# Altium PCB HMC460_2_a.PcbDoc
Units mil, origin at the board's own origin, x right, y up, seen from the top; angles counter-clockwise.
Board outline 5412 x 4271 mil, 3 copper layers (Top Layer, InternalPlane1, Bottom Layer); 47 components, 29 nets, 201 pads, 167 vias.
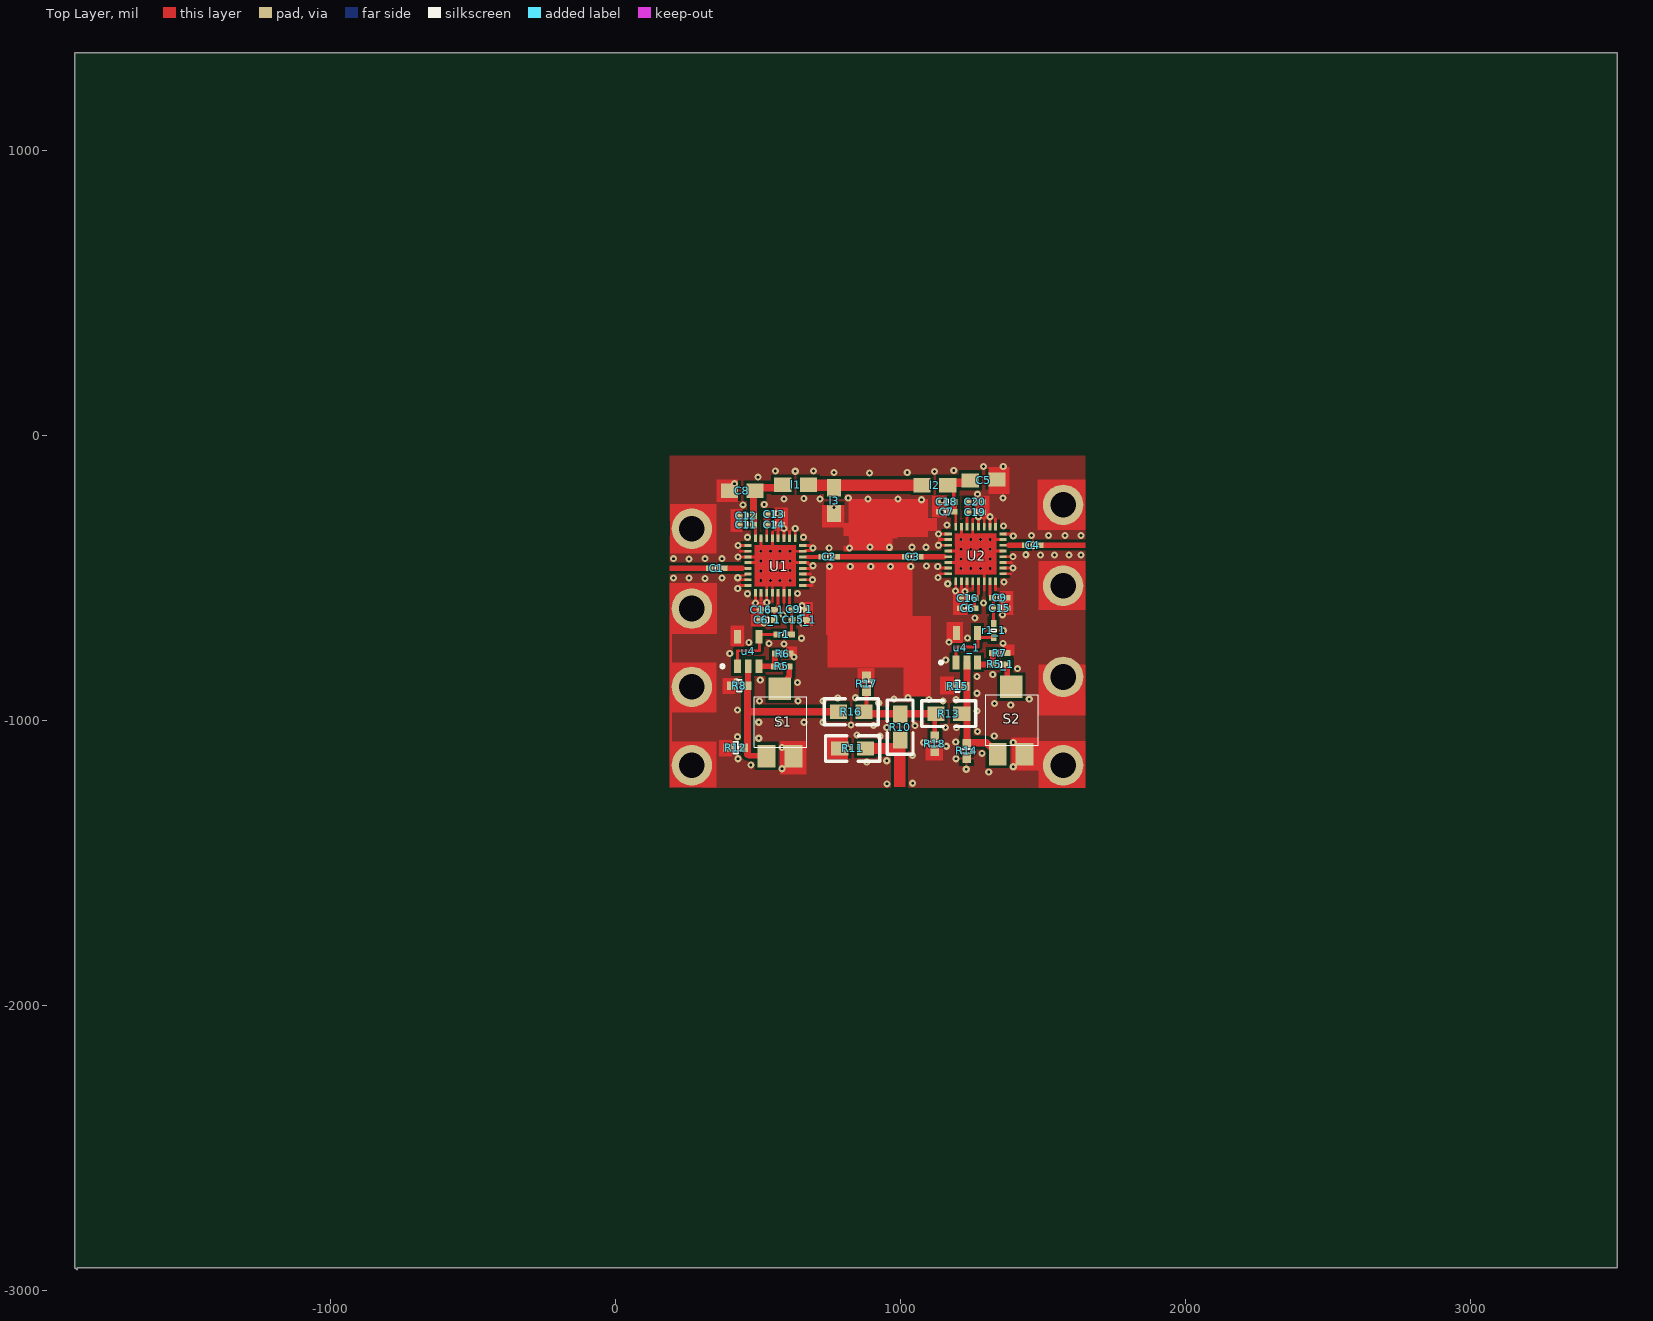
[diagram p0: Top Layer view]
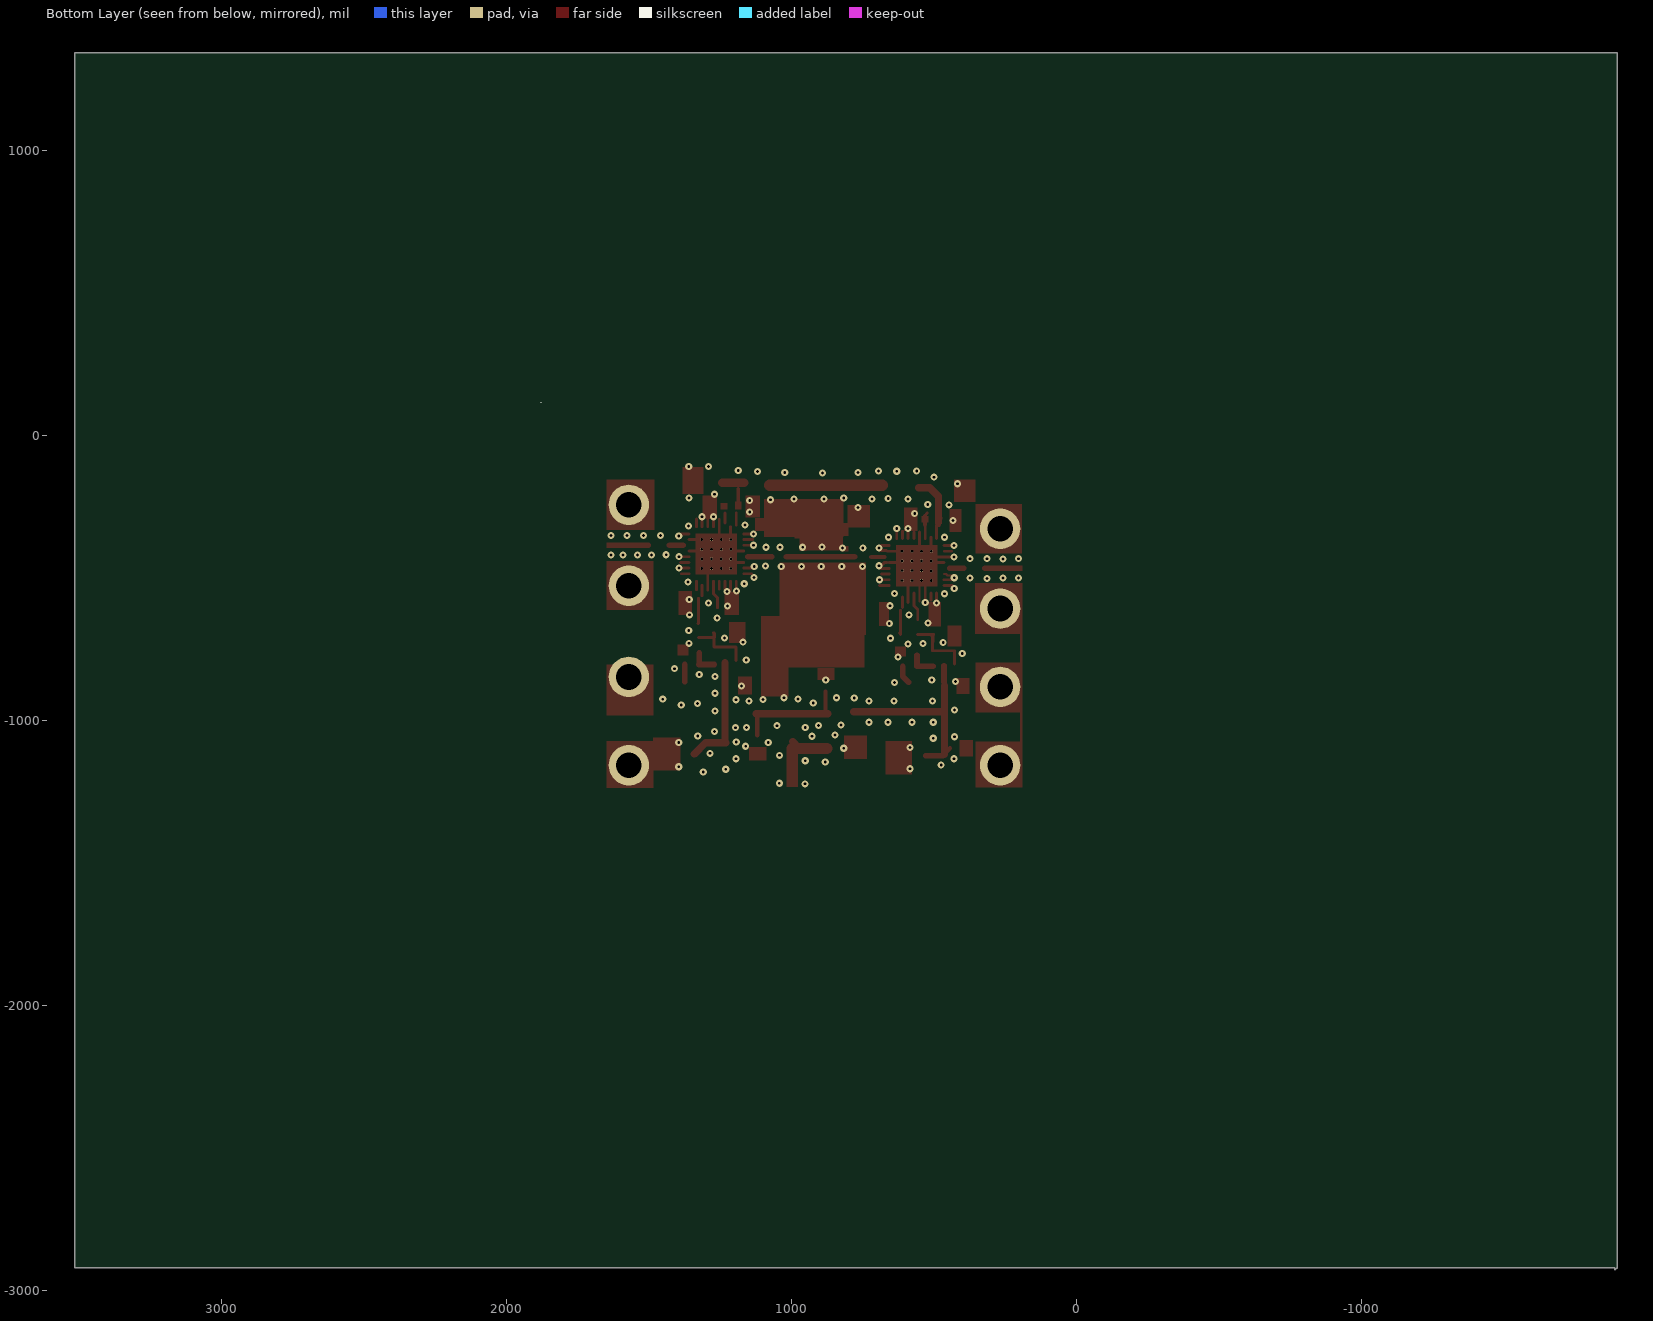
[diagram p1: Bottom Layer view, seen from below]
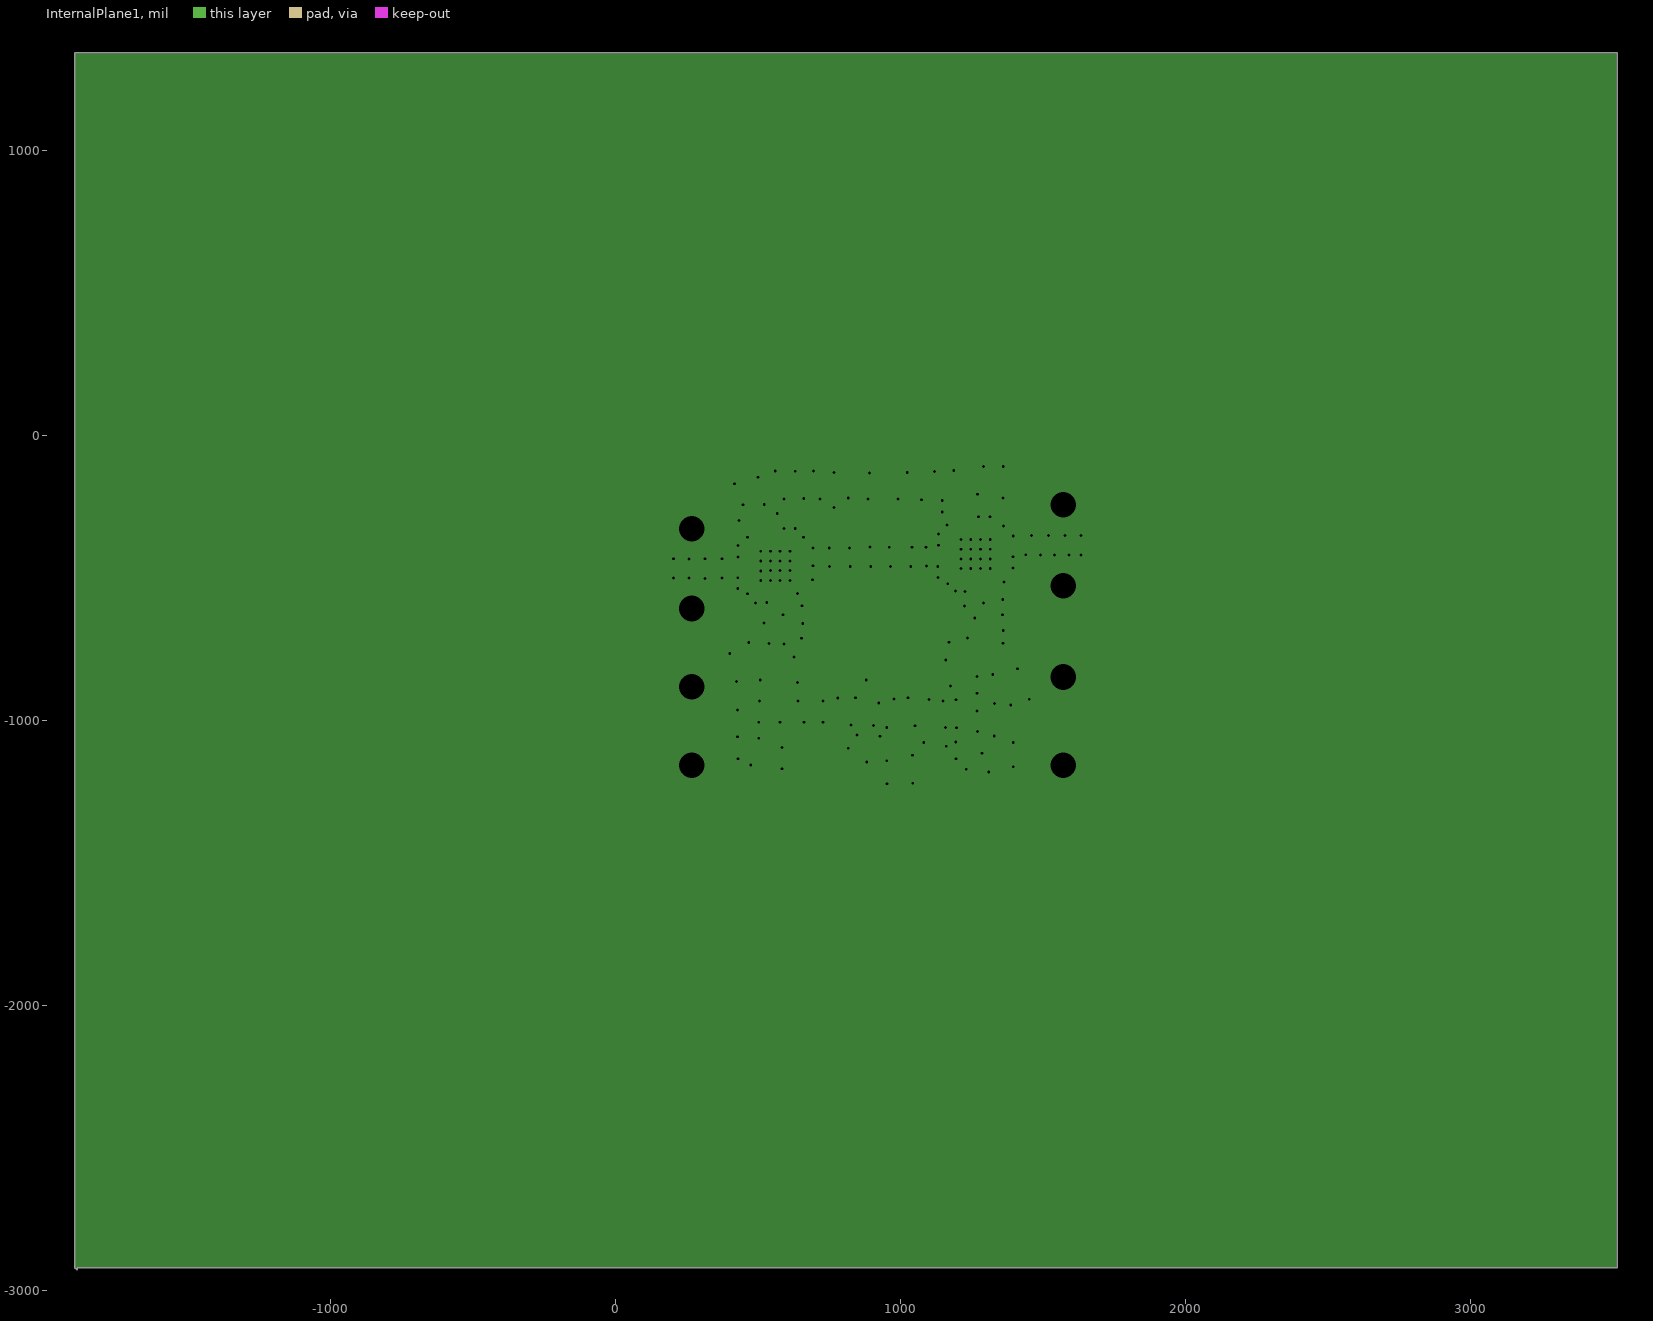
[diagram p2: InternalPlane1, clearances drawn from the general rule]

## Layer stack, top to bottom
Top Layer: signal copper 1.4
Dielectric: core 12.6, FR-4, Dk 4.8
InternalPlane1: plane copper 1.4, net GND
Dielectric: prepreg 12.6, FR-4, Dk 4.8
Bottom Layer: signal copper 1.4

## Board outline
-1898,-2921 -1898,1342 -1440,1342 3514,1342 3514,852 3514,-2921 3320,-2921 -1890,-2921 -1890,-2929

## Design rules (kind name [scope] priority, off if disabled: settings)
Clearance [OnLayer('Top Layer')] p1: gap=5
ComponentClearance [All] p1: gap=10 collisioncheckmode=3 verticalgap=15
PlaneClearance [All] p1: clearance=20
PlaneConnect [All] p1: planeconnectstyle=Relief reliefexpansion=20 reliefentries=4 reliefconductorwidth=10 reliefairgap=10
PolygonConnect [All] p1: connectstyle=Relief reliefconductorwidth=10 reliefentries=4 polygonreliefangle="90 Angle"
RoutingVias [All] p1: holewidth=10 width=20 viastyle="Through Hole" minholewidth=10 minwidth=20 maxholewidth=28 maxwidth=50
SolderMaskExpansion [All] p1: expansion=4
TestPointUsage [All] p1: valid=0 allowmultiple=FALSE
Testpoint [All] p1: side=15 testpointundercomponent=TRUE minsize=40 maxsize=100 preferedsize=60 minholesize=0 maxholesize=40 preferedholesize=32 testpointgrid=1 style=1023 order=0123456789
Width [All] p1: maxlimit=300 minlimit=5 preferedwidth=10 minimp=50.000000 maximp=50.000000 favimp=50.000000
16 further rules are at their usual default settings.

## Components (designator, comment, footprint, x,y, rotation, side; value= is the part's Value field where it differs from the comment)
C1 "" 0402 330,-467 r0 top
C2 "" 0402 774,-426 r180 top
C3 "" 0402 1017,-426 r0 top
C4 "" 0402 1438,-386 r0 top
C5 "" 0805#1 1248,-155 r0 top
C6 "" 0402 1260,-607 r180 top
C6_1 "" 0402 557,-648 r180 top
C7 "" 0402 1186,-268 r180 top
C8 "" 0805#2 489,-195 r180 top
C9 "" 0402 1322,-570 r0 top
C9_1 "" 0402 619,-611 r0 top
C11 "" 0402 483,-314 r180 top
C12 "" 0402 483,-283 r180 top
C13 "" 0402 531,-277 r0 top
C14 "" 0402 531,-314 r0 top
C15 "" 0402 1322,-607 r0 top
C15_1 "" 0402 619,-648 r0 top
C16 "" 0402 1260,-571 r180 top
C16_1 "" 0402 557,-612 r180 top
C18 "" 0402 1186,-234 r180 top
C19 "" 0402 1236,-270 r0 top
C20 "" 0402 1236,-233 r0 top
l1 "" 0805#2 676,-174 r180 top
l2 "" 0805#2 1075,-175 r0 top
l3 "" 0805#2 766,-184 r270 top
r1 "" 0402 616,-699 r180 top
r1_1 "" 0402 1326,-660 r270 top
R5 "" 0402 558,-811 r0 top
R5_1 "" 0402 1374,-804 r180 top
R6 "" 0402 561,-766 r0 top
R7 "" 0402 1323,-764 r0 top
R8 "" 0603 461,-879 r180 top
R10 "" 0805#2 998,-1069 r90 top
R11 "" 0805#2 876,-1099 r180 top
R12 "" 0603 449,-1097 r180 top
R13 "" 0805#2 1124,-977 r0 top
R14 "" 0603 1231,-1080 r270 top
R15 "" 0603 1227,-880 r180 top
R16 "" 0805#2 871,-970 r180 top
R17 "" 0603 880,-899 r90 top
R18 "" 0603 1120,-1055 r270 top
S1 "" ST4B_trim 623,-1126 r0 top
S2 "" ST4B_trim 1435,-1119 r0 top
U1 "" HMC460LC5#1 464,-387 r0 top
U2 "" HMC460LC5#2 1167,-346 r0 top
u4 "" SO-G5/P.95 465,-768 r0 top
u4_1 "" SO-G5/P.95 1232,-755 r0 top

## Footprints (in the part's own frame and the unit in brackets; to place one, negate y for a bottom-side part, rotate by r counter-clockwise, add the part's x,y. Pads: shape width x height; smd on the part's side, far side on the other; paste and mask are expansions set on the pad)
0402 [mil]
  rect 25x20 smd: 1(0,0) 2(50,0)
  silkscreen extent 20,-10 30,10
0603 [mil]
  rect 30x30 smd: 1(0,0) 2(55,0)
  silkscreen extent 20,-20 35,20
0805#1 [mil]
  rect 60x50 smd: 1(-4,-4) 2(90,0)
0805#2 [mil]
  rect 60x50 smd: 1(0,0) 2(90,0)
HMC460LC5#1 [mil]
  round 10 hole 10 mask+0: 0(45,-122) 0(45,-89) 0(45,-54) 0(45,-20) 0(79,-122) 0(79,-88) 0(79,-54) 0(79,-20) 0(113,-122) 0(113,-88) 0(113,-54) 0(113,-20) 0(147,-122) 0(147,-88) 0(147,-54) 0(147,-20)
  rect 26x10 smd: 1(0,0) 2(0,-20) 3(0,-40) 4(0,-60) 5(0,-80) 6(0,-100) 7(0,-120) 8(0,-140) 17(192,-140) 18(192,-120) 19(192,-100) 20(192,-80) 21(192,-60) 22(192,-40) 23(192,-20) 24(192,0)
  rect 10x26 smd: 9(26,-166) 10(46,-166) 11(66,-166) 12(86,-166) 13(106,-166) 14(126,-166) 15(146,-166) 25(166,25) 26(146,25) 27(126,25) 28(106,25) 29(86,25) 30(66,25) 31(46,25) 32(26,25)
  Top Layer region: 169,2 23,2 23,-143 169,-143
HMC460LC5#2 [mil]
  round 10 hole 10 mask+0: 0(45,-122) 0(45,-88) 0(45,-54) 0(45,-20) 0(79,-122) 0(79,-88) 0(79,-54) 0(79,-20) 0(113,-122) 0(113,-88) 0(113,-54) 0(113,-20) 0(147,-122) 0(147,-88) 0(147,-54) 0(147,-20)
  rect 26x10 smd: 1(0,0) 2(0,-20) 3(0,-40) 4(0,-60) 5(0,-80) 6(0,-100) 7(0,-120) 8(0,-140) 17(192,-140) 18(192,-120) 19(192,-100) 20(192,-80) 21(192,-60) 22(192,-40) 23(192,-20) 24(192,0)
  rect 10x26 smd: 9(26,-166) 10(46,-166) 11(66,-166) 12(86,-166) 13(106,-166) 14(126,-166) 15(146,-166) 16(166,-166) 25(166,25) 26(146,25) 27(126,25) 28(106,25) 29(86,25) 30(66,25) 31(46,25) 32(26,25)
  Top Layer region: 169,2 23,2 23,-143 169,-143
SO-G5/P.95 [mm] "5LEAD SOT23"
  rect 0.62x1.22 smd: 1(-0.95,-1.075) 2(0,-1.075) 3(0.95,-1.075) 4(0.965,1.549) 5(-0.94,1.549)
  silkscreen extent -2.45,-1.22 -2.15,-0.93
ST4B_trim [mm]
  rect 1.6x2 smd mask+0: 1(0,0) 3(-2.4,0)
  rect 2x2 smd mask+0: 2(-1.2,6)
  silkscreen extent -3.5,0.8 1.2,5.3

## Free pads (board coordinates)
  round 142 hole 90: 1(267,-328) 1(1570,-244) 5(267,-608) 6(1570,-848) 6(1570,-528)
  round 142 hole 90 unplated mask+0: 3(1570,-1158) 4(267,-1158) 5(267,-883)

## Via types
v1: diameter 25, hole 10, Top Layer to Bottom Layer, 167 vias

## Nets (pads, with @x,y where several pads share a name; then routed paths per layer and width w, separated by ;. In a path a pad name is that pad's centre, name@x,y a point inside that pad or via, vN(x,y) a via of type N, cw(c..) or ccw(c..) an arc to the next point about the centre after c; other vN are vias at no path point)
GND: C5.2 C6.2 C6_1.2 C7.2 C8.2 C9.2 C9_1.2 C11.2 C12.2 C13.2 C14.2 C15.2 C15_1.2 C16.2 C16_1.2 C18.2 C19.2 C20.2 l3.2 pad.1 pad.3 pad.4 pad.5 pad.6 R6.2 R7.2 R8.2 R11.2 R12.2 R14.2 R15.2 R17.2 R18.2 S1.1 S2.1 U1.0 U1.1 U1.2 U1.3 U1.4 U1.6 U1.7 U1.8 U1.9 U1.10 U1.11 U1.12 U1.14 U1.17 U1.18 U1.19 U1.20 U1.21 U1.23 U1.24 U1.25 U1.26 U1.27 U1.28 U1.29 U1.31 U2.0 U2.1 U2.2 U2.3 U2.4 U2.7 U2.8 U2.9 U2.10 U2.11 U2.12 U2.14 U2.16 U2.17 U2.18 U2.19 U2.20 U2.21 U2.23 U2.24 U2.25 U2.26 U2.27 U2.28 U2.31 u4.5 u4_1.5 | length 2315.3
  Top Layer w8: v1@426,-492 452.27,-492 457.27,-487 U1.6 ; U1.11 530,-524 ; 550,-583 550,-526.66 ; U2.14 1293,-482
  Top Layer w10: 193,-1230 193,-694 194,-694 ; 434,-527 U1.8 ; v1@434,-387 U1.1 ; v1@436,-507 U1.7 ; v1@436,-427 U1.3 491,-427 ; 437,-407 U1.2@463,-407 ; U1.4 492,-447 ; v1@490,-580 U1.9 ; 510,-579 U1.10 ; 510,-401 U1.31 ; v1@530,-582 U1.11@530,-554 ; 550,-395 550,-339 ; U1.28 570,-339 ; 590,-587 590,-521 ; U1.27 v1@590,-339 ; U1.26 610,-337 ; 619,-407 662.69,-407 665.69,-404 v1@689,-404 ; 620,-447 U1.21 ; U1.25 v1@630,-337 ; U1.17 690,-527 ; U1.18 v1@688,-507 ; U1.19 684,-487 ; U1.20 v1@687,-467 ; U1.24 v1@685,-387 ; U1.21@664,-447 674,-447 v1@687,-460 ; 789,-454 805,-454 ; v1@970.6,-453.8 v1@971,-455 ; v1(1132,-346) U2.1 ; v1@1135,-466 U2.7 ; 1135,-366 U2.2 ; v1@1137,-386 U2.3 ; 1140,-486 U2.8 ; 1167,-446 1199,-446 ; U2.4 1195,-406 ; v1@1193,-540 U2.9 ; 1213,-543 U2.10 ; 1213,-360 U2.31 ; v1@1233,-541 U2.11 ; 1253,-540 U2.12 ; 1253,-321 1253,-296 ; U2.28 v1@1273,-295 ; 1293,-543 U2.14 ; U2.27 1293,-296 ; U2.26 v1@1313,-295 ; 1322,-366 U2.23 ; 1323,-406 U2.21 ; 1333,-542 U2.16 ; U2.25 1333,-294 ; U2.17 1386,-486 ; U2.18 v1@1391,-466 ; U2.19 1389,-446 ; U2.20 v1@1388,-426 ; U2.24 v1@1388,-346
  other v1: 952,-1223 1042,-1221 1309,-1182 1230,-1172 583,-1170 1395,-1163 474,-1157 881,-1147 951,-1142 429,-1135 1194,-1135 1041,-1123 1285,-1116 816,-1098 583,-1095 1160,-1091 1081,-1078 1395,-1078 1193,-1076 502,-1063 427,-1058 927,-1056 1328,-1055 846,-1052 1270,-1040 1196,-1026 951,-1025 1157,-1025 1050,-1019 904,-1018 826,-1017 502,-1007 577,-1007 661,-1007 727,-1007 1268,-968 427,-964 1386,-946 1329,-941 923,-940 639,-933 727,-933 505,-932 1148,-932 1194,-928 1099,-927 1451,-926 976,-925 779,-922 841,-921 1026,-921 1268,-905 1175,-880 638,-867 424,-864 507,-859 879,-859 1268,-847 1323,-839 1410,-819 1158,-788 625,-778 400,-766 591,-732 538,-731 1359,-730 467,-727 1170,-726 652,-712 1234,-711 1360,-685 656,-661 520,-659 1260,-641 587,-630 1357,-630 1224,-599 654,-598 490,-588 1291,-588 530,-587 1358,-576 462,-556 638,-555 1225,-548 1192,-547 428,-538 1165,-521 1362,-515 691,-507 313,-502 203,-501 257,-501 373,-501 428,-500 1131,-499 1394,-466 823,-461 750,-460 895,-460 964,-460 1035,-460 1130,-460 1090,-459 692,-458 257,-434 203,-433 313,-433 373,-433 429,-427 1394,-426 1491,-420 1540,-420 1590,-420 1633,-420 1439,-419 692,-396 749,-395 820,-395 960,-393 1040,-393 1089,-393 892,-392 429,-387 1132,-386 462,-358 659,-358 1395,-353 1459,-352 1519,-352 1577,-352 1633,-352 590,-327 630,-327 1361,-318 1162,-315 432,-299 1273,-286 1313,-286 567,-275 1146,-269 766,-253 447,-244 521,-243 1146,-229 1073,-226 591,-223 717,-223 885,-223 990,-223 660,-222 816,-220 1359,-220 1270,-207 417,-170 499,-147 890,-132 766,-130 1023,-130 1119,-127 630,-126 560,-125 694,-125 1186,-124 1290,-110 1360,-110
NetAR1_1: 
NetAR1_3: 
NetC5_1: 
NetC6_1: 
NetC7_1: 
NetC7_2: 
NetC8_1: 
NetC8_2: 
NetC9_2: 
NetC10_1: 
NetC10_2: 
NetC11_1: 
NetC12_1: 
NetC13_1: 
NetC14_1: 
NetC15_1: 
NetC16_1: 
NetF1_2: 
NetR4_1: 
NetU1_2: 
NetU1_3: 
NetU1_4: 
NetU4_3: 
NetU4_4: 
VCC: 
VDD: 
VDD-A: 
VIN: 
pads on no net: C1.1 C1.2 C2.1 C2.2 C3.1 C3.2 C4.1 C4.2 C5.1 C6.1 C6_1.1 C7.1 C8.1 C9.1 C9_1.1 C11.1 C12.1 C13.1 C14.1 C15.1 C15_1.1 C16.1 C16_1.1 C18.1 C19.1 C20.1 l1.1 l1.2 l2.1 l2.2 l3.1 r1.1 r1.2 r1_1.1 r1_1.2 R5.1 R5.2 R5_1.1 R5_1.2 R6.1 R7.1 R8.1 R10.1 R10.2 R11.1 R12.1 R13.1 R13.2 R14.1 R15.1 R16.1 R16.2 R17.1 R18.1 S1.2 S1.3 S2.2 S2.3 U1.5 U1.13 U1.15 U1.22 U1.30 U1.32 U2.5 U2.6 U2.13 U2.15 U2.22 U2.29 U2.30 U2.32 u4.1 u4.2 u4.3 u4.4 u4_1.1 u4_1.2 u4_1.3 u4_1.4
copper on no net: | length 4803.6
  Top Layer w10: 427,-803 427,-756 504,-756 504,-706 506,-706 ; 490,-362 490,-315 ; 500,-699 557,-699 ; 502,-723 502,-708 ; 510,-362 510,-358 ; 523,-273 533,-283 ; 530,-362 530,-323 ; 556,-646 556,-611 570,-597 570,-553 ; 610,-604 610,-567 ; 617,-699 617,-614 ; 619,-407 619,-405 ; 620,-447 620,-446 ; 1193,-315 1193,-272 ; 1194,-790 1194,-743 1271,-743 1271,-693 1273,-693 ; 1233,-308 1233,-273 ; 1253,-354 1253,-321 ; 1259,-605 1259,-570 1273,-556 1273,-512 ; 1269,-695 1269,-710 1326,-710 ; 1313,-563 1313,-526 ; 1322,-366 1322,-364 ; 1323,-406 1323,-405 ; 1326,-660 1326,-572
  Top Layer w12: 1186,-234 1186,-188
  Top Layer w15: 443,-1098 469,-1124 ; 482,-314 482,-283 484,-281 ; 531,-314 531,-283 ; 673,-427 719,-427 ; 880,-966 880,-899 ; 1119,-1053 1119,-980
  Top Layer w20: 205,-467 320,-467 ; 395,-467 444,-467 ; 464,-866 464,-809 ; 469,-1124 528,-1124 ; 502.4,-810.32 558.68,-810.32 558.68,-772.32 ; 588,-867 609,-846 609,-811 ; 778,-426 1017,-426 ; 1069,-426 1152,-426 ; 1270.08,-804 1324,-804 ; 1323,-803 1323,-764 ; 1374,-865 1374,-804 ; 1380,-386 1427,-386 ; 1502,-386 1631,-386
  Top Layer w25: 463,-1120 463,-970 781,-970 ; 463,-977 463,-879 ; 482,-291 483,-292 ; 484,-294 484,-214 514,-184 ; 515,-184 554,-184 ; 872,-977 1124,-977 ; 876,-1099 971,-1099 995,-1075 ; 1232,-923 1232,-797.32 ; 1232,-911 1232,-1077 1230,-1079 1300.51,-1079 1340.51,-1119
  Top Layer w30: 1165,-167 1242,-167
  Top Layer w40: 681,-175 1076,-175 ; 876,-1099 991,-1099 ; 996,-1198 996,-1099

## Polygon pours and split planes (outlines as drawn)
GND on Top Layer "gnd" (solid, remove dead copper, pour order 1000): 190,-1236 1648,-1236 1648,-72 190,-72 190,-1236
GND on InternalPlane1 (split plane): 1523.95,-479 1523.95,-1641.95 66.05,-1641.95 66.05,-478.05 1523.95,-478.05
GND on InternalPlane1 (split plane): 3513.95,852 3513.95,-2920.95 -1890,-2920.95 -1890.04,-2920.96 -1890.05,-2921 -1890.05,-2928.87 -1897.95,-2920.98 -1897.95,1341.95 3513.95,1341.95

## Other copper
Top Layer:
  region net GND: 1096,-224 817,-224 817,-357 1096,-357
  region net GND: 1020,-685 743,-685 743,-814 1020,-814
  region net GND: 1106,-635 1009,-635 1009,-916 1106,-916
  region net GND: 1041,-447 737,-447 737,-700 1041,-700
  region net GND: 972,-348 818,-348 818,-405 972,-405
  region net GND: 1400,-735 1360,-735 1360,-773 1400,-773
  region net GND: 693,-585 657,-585 657,-669 693,-669
  region net GND: 519,-585 474,-585 474,-671 519,-671
  region net GND: 636,-741 598,-741 598,-776 636,-776
  region net GND: 452,-668 402,-668 402,-741 452,-741
  region net GND: 421,-851 375,-851 375,-907 421,-907
  region net GND: 409,-1069 362,-1069 362,-1127 409,-1127
  region net GND: 908,-817 849,-817 849,-858 908,-858
  region net GND: 1187,-846 1137,-846 1137,-910 1187,-910
  region net GND: 1219,-655 1161,-655 1161,-729 1219,-729
  region net GND: 1234,-549 1184,-549 1184,-630 1234,-630
  region net GND: 1396,-547 1348,-547 1348,-630 1396,-630
  region net GND: 1311,-211 1261,-211 1261,-293 1311,-293
  region net GND: 1160,-211 1110,-211 1110,-289 1160,-289
  region net GND: 429,-155 353,-155 353,-234 429,-234
  region net GND: 445,-258 403,-258 403,-340 445,-340
  region net GND: 605,-254 557,-254 557,-335 605,-335
  region net GND: 803,-244 723,-244 723,-323 803,-323
  region net GND: 849,-307 799,-307 799,-354 849,-354
  region net GND: 989,-309 940,-309 940,-362 989,-362
  region net GND: 1149,-1094 1087,-1094 1087,-1142 1149,-1142
  region net GND: 815,-1054 735,-1054 735,-1136 815,-1136
  region net GND: 669,-1072 577,-1072 577,-1191 669,-1191
  region net GND: 1486,-1061 1389,-1061 1389,-1176 1486,-1176
  region net GND: 1648,-1073 1483,-1073 1483,-1237 1648,-1237
  region net GND: 1648,-804 1483,-804 1483,-983 1648,-983
  region net GND: 1648,-441 1484,-441 1484,-613 1648,-613
  region net GND: 1648,-155 1480,-155 1480,-333 1648,-333
  region net GND: 353,-241 190,-241 190,-415 353,-415
  region net GND: 355,-518 188,-518 188,-698 355,-698
  region net GND: 354,-798 190,-798 190,-973 354,-973
  region net GND: 353,-1074 188,-1074 188,-1236 353,-1236
  region: 1016,-1197 976,-1197 976,-1235 1016,-1235
  region: 208,-457 188,-457 188,-477 208,-477
  region: 1648,-376 1602,-376 1602,-396 1648,-396
  region net GND: 569,-284 569,-308.5 593,-308.5 593,-284
  region: 519,-284 519,-306 543,-306 543,-284
  region: 495,-312 495,-283 471,-283 471,-312
  region: 445,-313 445,-286 421,-286 421,-313
  region: 1198,-261 1198,-232 1174,-232 1174,-261
  region: 1224,-238 1224,-261 1248,-261 1248,-238
  region: 1274,-237 1274,-259 1298,-259 1298,-237
  region: 1148,-257 1148,-240 1124,-240 1124,-257
  region net GND: 1128,-290 1090,-290 1090,-335 1128,-335
  region net GND: 1382,-111 1308,-111 1308,-206 1382,-206
  region net GND: 971,-386 946,-386 946,-406 971,-406
  region net GND: 826,-388 799,-388 799,-407 826,-407

## Silkscreen, mask and mechanical layers (free items; w line width, h text height)
Bottom Overlay:
  lines w1: 1878,114 1879,114
Drill Guide:
  circle w5: c665,-1332 r35
  circle w1: c896,784 r68
  circle w1: c997,-2096 r68
  circle w1: c-941,-467 r24
  circle w1: c-941,-267 r35
  circle w1: c-941,-667 r35
  circle w1: c2658,-586 r35
  circle w1: c2658,-186 r35
  circle w1: c2658,-386 r24
  circle w5: c1700,-1332 r35
  circle w5: c1165,-1332 r35
  circle w5: c165,-1332 r35
  circle w5: c94,-1156 r35
  circle w5: c94,-696 r35
  circle w5: c94,-116 r35
  circle w5: c1600,0 r35
  circle w5: c1000,0 r35
  circle w5: c400,0 r35
  circle w5: c1742,-1146 r35
  circle w5: c1742.97,-76 r35
  circle w5: c1570,-1158 r35
  circle w5: c1570,-848 r35
  circle w5: c1570,-528 r35
  circle w5: c1570,-244 r35
  circle w5: c267,-1158 r35
  circle w5: c267,-883 r35
  circle w5: c267,-608 r35
  circle w5: c267,-328 r35
  circle w5: c1743,-656 r35
  lines w1: -997,-667 -893.46,-667 ; -996.54,-267 -893,-267 ; -955,-74 -689,-74 ; -955,-73 -955,-1238 -689,-1238 ; -951,-467 -829,-467 ; -941,-728 -941,-609 ; -941,-495 -941,-455 ; -941,-328 -941,-209 ; 0,-1332 1937,-1332 ; 0,0 1876,0 ; 85,-1156 104,-1156 ; 87,-116 102,-116 ; 88,-696 100,-696 ; 94,-1383 94,124 ; 165,-1341 165,-1322 ; 172,-1158 345,-1158 ; 180,-608 340,-608 ; 183,-883 347,-883 ; 183,-328 340,-328 ; 183,687 183,954 1650,954 1650,687 ; 187,-1999 187,-2266 1654,-2266 1654,-1999 ; 267,-1167 267,-328 ; 342,784 1650,784 ; 346,-2096 1654,-2096 ; 400,-5 400,5 ; 665,-1340 665,-1325 ; 896,760 896,817 ; 1000,-5 1000,5 ; 1165,-1339 1165,-1325 ; 1494,-244 1658,-244 ; 1497,-848 1640,-848 ; 1499,-1158 1652,-1158 ; 1527,-528 1652,-528 ; 1560,-244 1570,-244 ; 1570,-1158 1570,-149 ; 1600,-9 1600,10 ; 1650,-1295 1650,-74 187,-74 187,-1238 1650,-1238 ; 1700,-1340 1700,-1325 ; 1735,-656 1752,-656 ; 1737,-1146 1751,-1146 ; 1737,-76 1748,-76 ; 1743,-1383 1743,225 ; 2406,-1238 2672,-1238 2672,-73 ; 2406,-74 2672,-74 ; 2546,-386 2668,-386 ; 2610.46,-586 2714,-586 ; 2610.46,-186 2714,-186 ; 2658,-647 2658,-528 ; 2658,-414 2658,-374 ; 2658,-247 2658,-128 ; -1115,-1426 -689,-1426 -689,114 -1115,114 -1115,-1426 ; -4,687 1837,687 1837,1114 -4,1114 -4,687 ; 0,-2426 0,-1999 1841,-1999 1841,-2426 0,-2426 ; 0,-1426 0,114 1837,114 1837,-1426 0,-1426 ; 2406,-1426 2406,114 2833,114 2833,-1426 2406,-1426
  text "X21" at 2344,172 h35
  text "X2" at 3156,-128 h35
  text "X2" at -1228,-218 h35
Mechanical 1:
  lines w2: 187,-1237 187,-117 187,-73 1649,-73 1649,-1237 187,-1237

## Dimensions
346,-2096 to 187,-2266 on Drill Guide
342,784 to 183,954 on Drill Guide
2658,-528 to 2673,-642 on Drill Guide
2682,-392 to 2867,-466 on Drill Guide
2546,-386 to 2714,-586 on Drill Guide
2714,-186 to 2668,-386 on Drill Guide
-893.46,-667 to -829,-467 on Drill Guide
-893,-267 to -829,-467 on Drill Guide
100,-696 to 102,-116 on Drill Guide
104,-1156 to 100,-696 on Drill Guide
0,-1426 to 104,-1156 on Drill Guide
1748,-76 to 1971,114 on Drill Guide
1752,-656 to 1748,-76 on Drill Guide
1751,-1146 to 1752,-656 on Drill Guide
1837,-1426 to 1751,-1146 on Drill Guide
1937,-1332 to 1837,-1426 on Drill Guide
1000,-5 to 1600,10 on Drill Guide
400,8 to 1000,5 on Drill Guide
0,114 to 400,-5 on Drill Guide
-976,-267 to -1150,-135 on Drill Guide
2679,-156 to 2770,-98 on Drill Guide
1778,-49 to 1961,200 on Drill Guide
944.08,832.08 to 1002,911 on Drill Guide
1045.08,-2047.92 to 1098,-1931 on Drill Guide
-941,-328 to -956,-323 on Drill Guide
1165,-1325 to 1700,-1340 on Drill Guide
665,-1340 to 1165,-1325 on Drill Guide
165,-1341 to 665,-1340 on Drill Guide
0,-1426 to 165,-1341 on Drill Guide
896,760 to 183,687 on Drill Guide
0,-1999 to 0,-2426 on Drill Guide
2406,-1426 to 2833,-1426 on Drill Guide
2406,114 to 2658,-247 on Drill Guide
267,-328 to 187,-74 on Drill Guide
267,-608 to 267,-328 on Drill Guide
267,-883 to 267,-608 on Drill Guide
267,-1158 to 267,-883 on Drill Guide
1570,-1158 to 267,-1354 on Drill Guide
1570,-244 to 1650,-74 on Drill Guide
1570,-528 to 1570,-244 on Drill Guide
1570,-848 to 1570,-528 on Drill Guide
1570,-1158 to 1570,-848 on Drill Guide
1570,-1158 to 1650,-1295 on Drill Guide
1570,-1158 to 1650,-1238 on Drill Guide
267,-1158 to 187,-1238 on Drill Guide
267,-1158 to 187,-1294 on Drill Guide
0,114 to 1837,114 on Drill Guide
997,-2164 to 187,-1999 on Drill Guide
-4,687 to 183,687 on Drill Guide
1650,687 to 1837,687 on Drill Guide
-689,114 to -956,-184 on Drill Guide
-1115,114 to -955,-73 on Drill Guide
-689,114 to -893,-267 on Drill Guide
2833,114 to 2610.46,-186 on Drill Guide